# EAGLE board roverPCB (EAGLE 9.2.2)
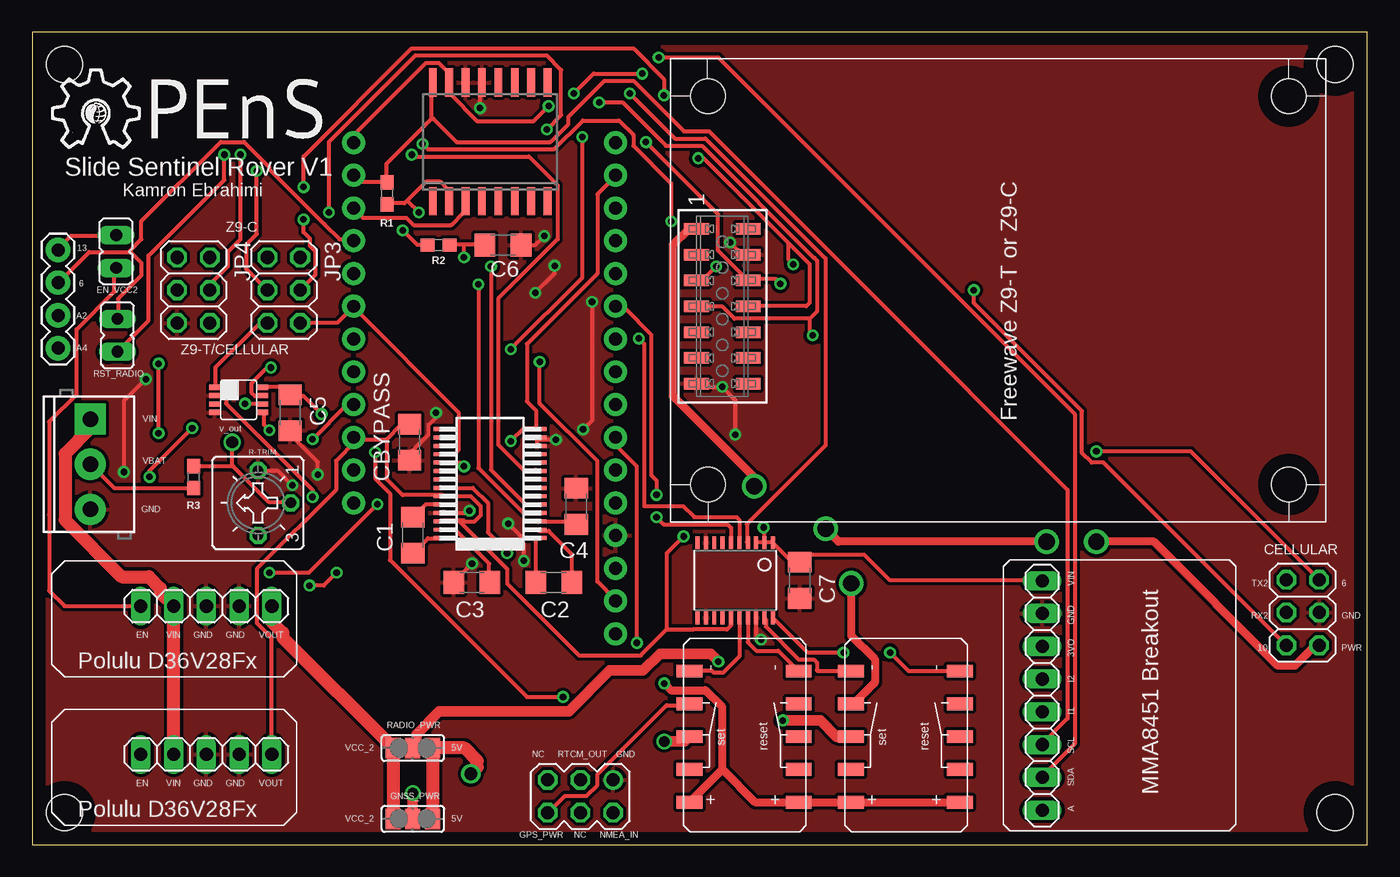
[diagram p0: board, top side]
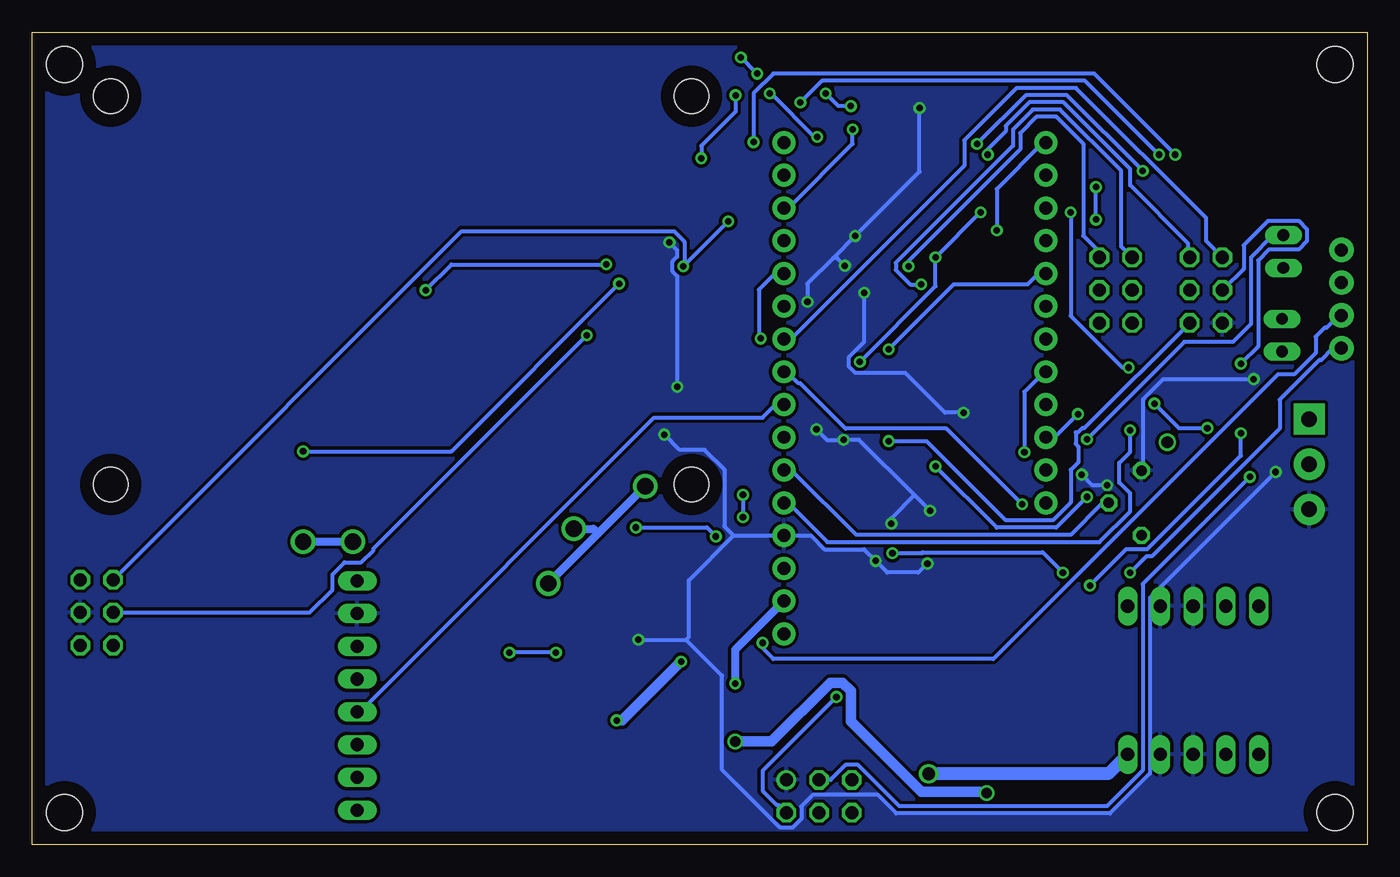
[diagram p1: board, bottom side, seen from below]

Size 103.5 x 63 mm. Coordinates in mm from the lower left corner, seen from the top.
Outline: 0,0 103.5,0 103.5,63 0,63 0,0
Copper layers (1*16): Top 0.035mm / dielectric 1.5mm / Bottom 0.035mm
Design rules "default *": minimum track width 3mil, minimum drill 0.35mm, track to track 6mil, track to pad 6mil, pad to pad 6mil, via to via 6mil, smd to smd 6mil, copper to edge 40mil, drill to drill 6mil, minimum pad ring 10mil, minimum via ring 8mil, stop-mask expansion 4mil, vias tented up to drill 0mil, thermal gap 10mil
Net classes: 0 default: width 0.305 mm, drill 0.508 mm, clearance 0.254 mm; 1 Power: width 0.635 mm, drill 1.27 mm, clearance 0.508 mm
Holes 2.8 mm at 2.5,60.5 101,60.5 2.5,2.5 101,2.5

## Footprints (pad centres in the part's own frame; a part is rotated, then mirrored left to right if it is on the bottom)
C1206 = smd 1.6 x 1.8: 1 -1.4,0; 2 1.4,0
SO16W = smd 0.6 x 2.2: 1 -4.445,-4.6; 2 -3.175,-4.6; 3 -1.905,-4.6; 4 -0.635,-4.6; 5 0.635,-4.6; 6 1.905,-4.6; 7 3.175,-4.6; 8 4.445,-4.6; 9 4.445,4.6; 10 3.175,4.6; 11 1.905,4.6; 12 0.635,4.6; 13 -0.635,4.6; 14 -1.905,4.6; 15 -3.175,4.6; 16 -4.445,4.6
DCT_R-PDSO-G8 = smd 0.4 x 0.8: 1 -0.975,-1.875; 2 -0.325,-1.875; 3 0.325,-1.875; 4 0.975,-1.875; 5 0.975,1.875; 6 0.325,1.875; 7 -0.325,1.875; 8 -0.975,1.875
1X04 = drill 1.016 pad 1.88: 1 0,0; 2 2.54,0; 3 5.08,0; 4 7.62,0
SCREWTERMINAL-3.5MM-3 = drill 1.2 pad 2.413 square: 1 0,0 | drill 1.2 pad 2.413: 2 3.5,0; 3 7,0
JP1 = drill 0.914 long: 1 0,-1.27; 2 0,1.27
2X03 = drill 1.016 octagon: 1 -2.54,-1.27; 2 -2.54,1.27; 3 0,-1.27; 4 0,1.27; 5 2.54,-1.27; 6 2.54,1.27
FEATHERWING = drill 1 pad 1.778: 1 6.35,1.27; 2 8.89,1.27; 3 11.43,1.27; 4 13.97,1.27; 5 16.51,1.27; 6 19.05,1.27; 7 21.59,1.27; 8 24.13,1.27; 9 26.67,1.27; 10 29.21,1.27; 11 31.75,1.27; 12 34.29,1.27; 13 36.83,1.27; 14 39.37,1.27; 15 41.91,1.27; 16 44.45,1.27; 17 44.45,21.59; 18 41.91,21.59; 19 39.37,21.59; 20 36.83,21.59; 21 34.29,21.59; 22 31.75,21.59; 23 29.21,21.59; 24 26.67,21.59; 25 24.13,21.59; 26 21.59,21.59; 27 19.05,21.59; 28 16.51,21.59
0603 = smd 1.1 x 1: 1 -0.85,0; 2 0.85,0
SJ_2 = smd 1.168 x 1.6: 1 -1.524,0; 2 0,0; 3 1.524,0
SSOP-28 = smd 0.3 x 1.5: 1 -4.225,-3.625; 2 -3.575,-3.625; 3 -2.925,-3.625; 4 -2.275,-3.625; 5 -1.625,-3.625; 6 -0.975,-3.625; 7 -0.325,-3.625; 8 0.325,-3.625; 9 0.975,-3.625; 10 1.625,-3.625; 11 2.275,-3.625; 12 2.925,-3.625; 13 3.575,-3.625; 14 4.225,-3.625; 15 4.225,3.625; 16 3.575,3.625; 17 2.925,3.625; 18 2.275,3.625; 19 1.625,3.625; 20 0.975,3.625; 21 0.325,3.625; 22 -0.325,3.625; 23 -0.975,3.625; 24 -1.625,3.625; 25 -2.275,3.625; 26 -2.925,3.625; 27 -3.575,3.625; 28 -4.225,3.625
POLULU_D36V28FX = drill 1.016 long: EN 0.08,-3.5; GND -7.54,-3.5; GND2 -5,-3.5; VIN -2.46,-3.5; VOUT -10.08,-3.5
CT6 = drill 0.813 octagon: A 2.515,0; E -2.515,0; S 0,-2.54
MA03-2 = drill 1.016: 1 -2.54,-1.27 | drill 1.016 octagon: 2 -2.54,1.27; 3 0,-1.27; 4 0,1.27; 5 2.54,-1.27; 6 2.54,1.27
TSSOP20 = smd 0.305 x 0.991: 1 -2.925,-2.918; 2 -2.275,-2.918; 3 -1.625,-2.918; 4 -0.975,-2.918; 5 -0.325,-2.918; 6 0.325,-2.918; 7 0.975,-2.918; 8 1.625,-2.918; 9 2.275,-2.918; 10 2.925,-2.918; 11 2.925,2.918; 12 2.275,2.918; 13 1.625,2.918; 14 0.975,2.918; 15 0.325,2.918; 16 -0.325,2.918; 17 -0.975,2.918; 18 -1.625,2.918; 19 -2.275,2.918; 20 -2.925,2.918
TQ2SS = smd 1 x 2: 2 -2.16,-4.418; 3 0.38,-4.418; 4 2.92,-4.418; 7 2.92,4.04; 8 0.38,4.04; 9 -2.16,4.04; +RST -4.7,-4.418; +SET -4.7,4.04; -RST 5.46,-4.418; -SET 5.46,4.04
Z9-T/Z9-C = smd 0.89 x 1.91: 1 6,2; 2 6,-2; 3 4,2; 4 4,-2; 5 2,2; 6 2,-2; 7 0,2; 8 0,-2; 9 -2,2; 10 -2,-2; 11 -4,2; 12 -4,-2; 13 -6,2; 14 -6,-2 | hole 2.7: -13.832,1.122; -13.832,-43.922; 16.302,-43.912; 16.302,1.122
MMA8451 = drill 1.016 long: 3VO 3.81,0; A -8.89,0; GND 6.35,0; I1 -1.27,0; I2 1.27,0; SCL -3.81,0; SDA -6.35,0; VIN 8.89,0

## Placement (x,y rotation side)
C1  .1uF  [C1206]  29.5,24 90 top
C2  .1uF  [C1206]  40.43,20.33 0 top
C3  .1uF  [C1206]  34.08,20.33 0 top
C4  .1uF  [C1206]  42.17,26.23 90 top
C5  .1uF  [C1206]  20,33.5 270 top
C6  .1uF  [C1206]  36.5,46.5 0 top
C7  .1uF  [C1206]  59.5,20.5 270 top
CBYPASS  .1uF  [C1206]  29.25,31.21 90 top
IC2  DS3231/SO  [SO16W]  35.5,54.5 0 top
IC3  741G53DCT  [DCT_R-PDSO-G8]  16,34.5 270 top
J1  [1X04]  2,38.5 90 top
J4  [SCREWTERMINAL-3.5MM-3]  4.5,33 270 top
JP1  [JP1]  6.6,39.5 180 top
JP2  [JP1]  6.5,46 180 top
JP3  [2X03]  19.5,43 270 top
JP4  [2X03]  12.5,43 270 top
JP5  [2X03]  98.5,18 90 top
MS1  FEATHERWING  [FEATHERWING]  46.5,10 90 top
R1  10k  [0603]  27.5,50.5 270 top
R2  10k  [0603]  31.5,46.5 0 top
R3  [0603]  12.5,28.5 270 top
SJ1  [SJ_2]  29.5,7.5 0 top
SJ2  [SJ_2]  29.5,2 0 top
U$1  MAX3243  [SSOP-28]  35.5,28 90 top
U$2  OPENS-LOGO  [OPENS-LOGO]  1.25,50.25 0 top
U$3  POLULU_D36V28FX  [POLULU_D36V28FX]  8.5,3.5 180 top
U$4  CT6EP205  [CT6]  17.5,26.5 90 top
U$5  GNSS_RECEIVER  [MA03-2]  42.5,3.75 180 top
U$7  MAX4820  [TSSOP20]  54.5,20.5 180 top
U$8  TQ2SS  [TQ2SS]  67.5,8 90 top
U$9  TQ2SS  [TQ2SS]  55,8 90 top
U$11  Z9-T/Z9-C  [Z9-T/Z9-C]  53.5,41.75 90 top
U$12  POLULU_D36V28FX  [POLULU_D36V28FX]  8.5,15 180 top
U$13  MMA8451  [MMA8451]  78.3,11.57 90 top

## Library data of the parts
C1-C7 CBYPASS = eagle-ltspice; SPICEMODEL: NONE; SPICEPREFIX: C
IC2 MS1 = adafruit
IC3 = 74xx-little-de
J1 = SparkFun-Connectors; PROD_ID: CONN-09696
J4 = SparkFun-Connectors; PROD_ID: CONN-08288; SF_ID: PRT-08235
JP1 JP2 = jumper
JP3-JP5 = pinhead
R1 R2 = SparkFun-Resistors; PROD_ID: RES-08787
R3 = SparkFun-Resistors; PROD_ID: RES-08361
SJ1 SJ2 = SparkFun-Retired
U$1 = ftdi4
U$2 = opens-logo
U$3 U$5 U$8 U$9 U$11-U$13 = SlideSentinel
U$4 = tango
U$7 = MAX4820

## Nets
3.3V_M0: C6.1 IC2.2 MS1.2 R1.2 R2.2 U$8.+RST U$8.+SET U$9.+RST U$9.+SET
5: IC2.3 MS1.19
6: J1.3 JP1.1 MS1.20
9: MS1.21 U$7.4
10: JP3.6 MS1.22 U$1.18
12: MS1.24 U$5.2
13: J1.4 JP2.1 MS1.25
A0: IC3.5 MS1.5
A1: MS1.6 R3.1 U$4.S
A2: J1.2 MS1.7
A3: MS1.8 U$13.I1
A4: J1.1 MS1.9
A5: JP4.1 MS1.10
C1+: C1.1 U$1.28
CD_RADIO: JP3.4 JP5.2 U$11.8
FORCEOFF_MAX: JP4.3 U$1.22
GND: C3.1 C4.2 C5.2 C6.2 C7.2 CBYPASS.1 IC2.13 IC2.14 IC3.2 IC3.4 J4.3 JP4.5 JP5.3 MS1.4 U$1.12 U$1.13 U$1.25 U$3.GND U$3.GND2 U$4.A U$5.1 U$7.9 U$7.12 U$7.18 U$11.4 U$11.13 U$12.GND U$12.GND2 U$13.GND
GPS_PWR: U$5.6 U$9.7
MISO: MS1.13
MOSI: MS1.12 U$7.5
N$1: SJ2.2 U$9.8
N$2: SJ1.2 U$8.8
N$4: C2.1 U$1.1
N$5: C2.2 U$1.2
N$10: C4.1 U$1.3
N$11: C1.2 U$1.24
N$13: C3.2 U$1.27
OUT1: U$7.20 U$8.-RST
OUT2: U$7.19 U$8.-SET
OUT3: U$7.17 U$9.-RST
OUT4: U$7.16 U$9.-SET
RADIO_PWR [Power]: JP5.1 U$8.7 U$11.1
RS232_CD_FROM_RADIO: JP3.2 U$1.5
RS232_TX_FROM_M0: JP4.2 U$1.9
RS232_TX_FROM_RADIO: JP3.1 U$1.4
RTCM_IN: IC3.6 U$5.3
RX: IC3.7 MS1.14
RX_RADIO: JP4.4 JP5.4 U$11.7
SCK: MS1.11 U$7.6
SCL: IC2.16 MS1.18 R1.1 U$13.SCL
SDA: IC2.15 MS1.17 R2.1 U$13.SDA
TX: JP4.6 MS1.15 U$1.14
TX_FROM_RADIO: IC3.1 JP3.5 U$1.19
TX_RADIO: JP3.3 JP5.6 U$11.5
VBAT: J4.2 R3.2
VCC: C5.1 C7.1 CBYPASS.2 IC3.8 MS1.26 SJ1.3 SJ2.3 U$1.23 U$1.26 U$3.VOUT U$7.1 U$7.2 U$7.3 U$7.15 U$13.VIN
VCC_2: SJ1.1 SJ2.1 U$12.VOUT
VIN: J4.1 U$3.VIN U$12.VIN
X1: JP1.2 JP5.5 U$11.6
X2: JP2.2 U$12.EN

## Tracks (layer width: path | path; a pad name or v marks a point on that pad's centre or on a via)
3.3V_M0  (via drill 0.51)
  Top 0.305: 33.47,46.52 35.01,46.52 C6.1 | 33.47,46.52 32.35,46.52 R2.2 | 29.07,49.94 30.54,51.41 31.65,51.41 32.21,50.85 32.21,50.01 IC2.2 | 29.07,49.94 28.86,49.73 27.6,49.73 R1.2 | v33.47,45.54 33.47,46.52 | 29.07,49.94 v29.98,49.03 | v39.34,37.44 39.34,34.23 43.81,29.76 43.81,20.4 45.2,19 MS1.2
  Top 0.61: v49,12.5 49.52,11.98 52.19,11.98 53.5,10.67 53.5,5.84 | 53.5,5.84 56.04,3.3 U$9.+RST U$8.+SET U$8.+RST | 53.5,5.84 U$9.+SET
  Bottom 0.305: v29.98,49.03 v33.47,45.54 33.47,43.31 v39.34,37.44
  Bottom 0.61: MS1.2 49,15.12 v49,12.5
5
  Top 0.305: IC2.3 33.47,49.87 33.47,49.03 32.49,48.06 29.56,48.06 29,48.62 25.65,48.62 24.95,49.31 MS1.19
6
  Top 0.305: 7.62,45.96 8.46,45.12 8.46,44.15 6.65,42.33 6.65,40.79 JP1.1 | 7.62,45.96 4.41,45.96 2.04,43.59 J1.3 | MS1.20 24.81,46.94 23.83,46.94 22.64,48.13 18.38,52.39 18.38,52.53 16.43,54.48 14.61,54.48 8.46,48.34 8.46,46.94 7.62,46.1 7.62,45.96
9  (via drill 0.51)
  Top 0.305: v46.32,58.26 49.81,54.76 52.19,54.76 61.5,45.45 61.5,30.96 58.06,27.52 57.77,27.23 55.4,24.87 55.4,23.47 U$7.4 | v42.65,54.88 42.65,43.96 v37.1,38.42
  Bottom 0.305: v46.32,58.26 46.22,58.26 42.85,54.88 v42.65,54.88 | v37.1,38.42 32.07,43.45 26.34,43.45 25.51,44.28 24.95,44.28 MS1.21
10
  Top 0.305: U$1.18 31.93,30.32 32.77,30.32 33.05,30.59 33.05,33.53 24.95,41.63 MS1.22 23.62,40.46 JP3.6
12  (via drill 0.51)
  Top 0.305: v41.15,11.46 38.36,11.46 27.74,22.07 27.74,27.24 26.58,28.4 v26.58,30.43
  Bottom 0.305: v41.15,11.46 46.88,5.73 46.88,4.19 45.76,3.07 45.62,3.07 45.06,2.52 U$5.2 | v26.58,30.43 26.58,35.11 24.95,36.74 MS1.24
13  (via drill 0.51)
  Top 0.305: JP2.1 6.37,47.22 3.02,47.22 2.04,46.24 J1.4 | v21.73,31.43 24.39,34.09 24.81,34.09 MS1.25
  Bottom 0.305: v21.73,31.43 14.19,38.98 10.42,38.98 9.02,40.37 9.02,45.54 7.34,47.22 6.51,47.22 JP2.1
A0  (via drill 0.51)
  Top 0.305: v18.38,32.13 17.96,32.55 17.96,33.39 IC3.5
  Bottom 0.305: v18.38,32.13 18.38,30.45 19.22,29.62 19.22,28.08 18.38,27.24 18.38,25.84 20.76,23.47 41.85,23.47 44.78,26.4 45.2,26.4 MS1.5
A1  (via drill 0.9)
  Top 0.305: 15.5,29.34 15.59,29.34 18.38,26.54 19.92,26.54 U$4.S | 15.5,29.34 12.51,29.34 R3.1 | 15.5,29.34 v15.5,31.2
  Bottom 0.305: MS1.6 45.2,28.92 44.51,28.92 39.62,24.03 22.99,24.03 20.62,26.4 20.06,26.4 U$4.S
A2  (via drill 0.51)
  Top 0.305: v46.88,15.65 46.88,29.34 45.34,30.87 45.34,31.57 MS1.7
  Bottom 0.305: v46.88,15.65 47.02,15.51 47.02,15.37 46.04,14.39 29,14.39 6.93,36.46 5.67,36.46 3.99,38.14 3.99,39.4 3.29,40.09 3.15,40.09 2.32,40.93 2.04,40.93 J1.2
A3
  Bottom 0.305: U$13.I1 78.17,10.34 78.06,10.34 55.28,33.11 46.88,33.11 45.9,34.09 45.34,34.09 MS1.8
A4  (via drill 0.51)
  Top 0.305: v26.76,26.4 21.45,21.09 v18.38,21.09
  Bottom 0.305: v26.76,26.4 32.63,32.27 40.45,32.27 43.95,35.76 44.09,35.76 44.92,36.6 45.2,36.6 MS1.9 | v18.38,21.09 17.12,22.35 16.7,22.35 6.79,32.27 6.79,34.51 3.71,37.58 3.57,37.58 2.73,38.42 2.04,38.42 J1.1
A5
  Bottom 0.305: MS1.10 45.2,39.26 44.65,39.26 31.23,52.67 31.23,54.62 27.18,58.67 22.57,58.67 12.51,48.62 12.51,46.82 JP4.1
C1+
  Top 0.305: U$1.28 31.79,23.75 30.68,23.75 29.56,22.63 C1.1
CD_RADIO  (via drill 0.51)
  Top 0.305: 58.64,46.64 52.05,53.23 v51.63,53.23 | v48.98,58.12 48.98,59.37 46.6,61.75 29.42,61.75 21.04,53.37 v21.04,50.99 | v21.04,48.48 21.04,47.5 21.52,47.02 21.52,46.45 21.94,46.02 21.94,44.17 JP3.4 | 58.64,46.64 60.27,45 60.27,42 60.02,41.75 U$11.8 | v73,43 73,42.01 81.39,33.62 81.39,30.39 82.14,29.64 83.05,29.64 JP5.2 | v59,45 58.64,45.36 58.64,46.64
  Bottom 0.305: v51.63,53.23 51.63,54.2 48.98,56.86 v48.98,58.12 | v21.04,48.48 v21.04,50.99 | v73,43 71,45 v59,45
FORCEOFF_MAX  (via drill 0.51)
  Top 0.305: v36.81,22.61 36.81,22.74 35.32,24.23 35.32,26.49 34.14,27.67 31.88,27.67 U$1.22 | v23.6,21.1 22.6,20.1 v21.5,20.1 | v9.8,31.9 v9.8,37.3
  Bottom 0.305: v36.81,22.61 34.52,22.61 34.46,22.66 25.16,22.66 v23.6,21.1 | v21.5,20.1 18.68,22.92 17.06,22.92 9.8,30.18 v9.8,31.9 | v9.8,37.3 8.46,38.64 8.46,45.31 7.62,46.15 5.33,46.15 4.67,46.81 4.67,47.73 5.33,48.39 7.67,48.39 9.58,46.48 9.58,44.65 JP4.3
GND  (via drill 0.51)
  Top 0.305: C6.2 39,46.5 v39.7,47.2 | v43.4,42.1 43.4,32.9 v42.7,32.2 | v40.6,31.4 39.3,31.4 U$1.13 U$1.12 | v34.71,57.11 34.71,58.95 IC2.13 | v33.9,25.9 33.73,25.73 32.11,25.73 32.1,25.73 32.09,25.73 U$1.25 | v34.1,21.8 32.68,20.38 C3.1 | U$4.A 19.02,29.02 v20.16,27.87 | v22.13,28.7 22.13,29.67 20,31.8 C5.2 | v39,42.8 40.5,44.3 v40.5,44.9 | v36.9,24.9 37.97,23.83 37.97,23.46 38.11,23.32 v38.11,22.01 | v8.8,36.1 7.1,34.4 v7.1,28.9 | CBYPASS.1 29.25,30.34 30.72,31.8 30.72,32.54 31.3,33.12 v31.3,33.5 | v54.1,46.7 55.05,45.75 U$11.4 | U$11.13 51.75,35.5 v53.5,35.5 54.5,34.5 v54.5,31.8 | U$7.18 56.12,16.27 v56.5,15.9
  Bottom 0.305: v56.5,15.9 52.8,15.9 | 52.8,15.9 52.6,16.1 52.6,20.5 49.13,23.97 | 49.13,23.97 MS1.4 43.14,23.97 42.08,22.91 39.01,22.91 v38.11,22.01 37.2,21.1 34.8,21.1 v34.1,21.8 | v54.5,31.8 53.32,30.62 51.38,30.62 49.84,29.09 49.84,24.68 49.13,23.97 | v54.1,46.7 53.5,46.1 53.5,45.59 53.89,45.2 53.89,44.49 53.5,44.09 v53.5,35.5 | 41.4,45.5 v39.7,47.2 34.71,52.19 v34.71,57.11 | 41.4,45.5 43.4,43.5 v43.4,42.1 | v42.7,32.2 41.9,31.4 v40.6,31.4 39.4,31.4 35.1,27.1 | v33.9,25.9 35.1,27.1 | 35.1,27.1 36.9,25.3 v36.9,24.9 | v20.16,27.87 21.3,27.87 v22.13,28.7 | v39,42.8 39,39 40.2,37.8 40.2,37.08 39.69,36.58 35.81,36.58 32.73,33.5 v31.3,33.5 | v40.5,44.9 41.1,45.5 41.4,45.5 | U$4.A 17.36,29.15 17.36,34.56 15.82,36.1 v8.8,36.1 | v7.1,28.9 16.85,19.15 16.85,5.52 19.94,2.43 36.51,2.43 37.93,3.85 42.98,3.85 43.87,2.96 43.87,2 44.56,1.31 45.52,1.31 50.01,5.8 50.01,13.11 52.8,15.9
  pour Top: 0,63 103.5,63 103.5,0 0,0
  pour Bottom: 0,63 103.5,63 103.5,0 0,0
  pour Top: 52.4,22 56.5,22 56.5,19 52.3,19 52.3,22
GPS_PWR
  Top 0.305: U$5.6 40.03,2.52 41.29,3.77 42.97,3.77 43.81,4.61 43.81,5.45 49.18,10.82 50.86,10.82 U$9.7
MOSI  (via drill 0.51)
  Top 0.305: v47.02,39.26 47.44,38.84 47.44,26.26 50.47,26.26 51.34,25.4 54.6,25.4 54.83,25.18 U$7.5
  Bottom 0.305: v47.02,39.26 47.16,39.4 47.16,43.03 45.9,44.28 45.34,44.28 MS1.12
N$1  (via drill 0.8)
  Top 0.8: SJ2.2 v29.5,4 | v49,8 50.58,8 U$9.8
  Bottom 0.8: v29.5,4 29.6,4.1 34.58,4.1 40.04,9.56 40.04,11.92 40.69,12.57 41.61,12.57 46.18,8 v49,8
N$2  (via drill 0.51)
  Top 0.8: SJ1.2 29.79,7.79 29.79,8.57 31.56,10.34 41.61,10.34 44.77,13.5 47.35,13.5 48.66,14.8 52.61,14.8 53.2,14.22 v53.2,14.2 | v58.2,9.64 61.11,9.64 62.37,8.38 U$8.8
  Bottom 0.8: v53.2,14.2 57.76,9.64 v58.2,9.64
N$4
  Top 0.305: U$1.1 39.06,23.75 39.06,20.4 C2.1
N$5
  Top 0.305: U$1.2 39.34,24.33 40.04,24.33 41.83,22.55 C2.2
N$10
  Top 0.305: U$1.3 39.2,25.01 41.99,25.01 42.13,24.87 C4.1
N$11
  Top 0.305: U$1.24 31.79,26.4 30.54,26.4 29.56,25.43 C1.2
N$13
  Top 0.305: U$1.27 31.93,24.45 32.77,24.45 35.42,21.79 35.42,20.4 C3.2
OUT1  (via drill 0.51)
  Top 0.305: U$7.20 60.08,14.93 62.88,14.93 v62.9,14.9 | v66.5,14.9 67.94,13.46 U$8.-RST
  Bottom 0.305: v62.9,14.9 v66.5,14.9
OUT2
  Top 0.305: U$8.-SET 60.9,13.46 60.83,13.53 60.83,14.13 60.59,14.37 59.42,14.37 56.87,16.92 56.87,17.49 U$7.19
OUT3
  Top 0.305: U$9.-RST 57.84,15.04 56.14,15.04 55.48,15.7 U$7.17
OUT4
  Top 0.305: U$9.-SET 52.72,13.46 52.84,13.34 53.56,13.34 54.83,14.6 U$7.16
RADIO_PWR  (via drill 1.27)
  Top 0.635: v55.96,27.8 55.96,28.5 49.67,34.78 49.67,46.52 50.9,47.75 U$11.1 | v63.51,20.26 63.51,16.2 65.32,14.39 65.32,12.57 63.67,10.92 U$8.7 | JP5.1 99.47,15.46 97.89,13.87 96.57,13.87 86.94,23.5 v82.5,23.5 | v78.66,23.5 62.5,23.5 v61.5,24.5
  Bottom 0.635: v63.51,20.26 59.63,24.13 | 59.63,24.13 v55.96,27.8 | v82.5,23.5 v78.66,23.5 | v61.5,24.5 60,24.5 59.63,24.13
RS232_CD_FROM_RADIO  (via drill 0.51)
  Top 0.305: v35.56,44.84 35.56,29.06 38.22,26.4 39.06,26.4 U$1.5
  Bottom 0.305: v35.56,44.84 35.56,45.26 26.9,53.92 26.9,55.18 25.65,56.44 24.11,56.44 22.01,54.34 22.01,47.22 20.77,45.98 JP3.2
RS232_TX_FROM_M0  (via drill 0.51)
  Top 0.305: v29.42,53.51 29.56,53.37 38.5,53.37 40.73,51.13 40.73,46.94 36.12,42.33 36.12,31.01 38.08,29.06 39.06,29.06 U$1.9
  Bottom 0.305: v29.42,53.51 29.42,53.92 28.02,55.32 28.02,55.74 26.2,57.56 23.55,57.56 18.38,52.39 18.38,51.13 13.91,46.66 13.91,45.68 JP4.2
RS232_TX_FROM_RADIO  (via drill 0.51)
  Top 0.305: v34.59,43.45 34.59,29.2 38.08,25.7 39.06,25.7 U$1.4
  Bottom 0.305: v34.59,43.45 35.42,43.45 36.54,44.56 36.54,45.12 27.46,54.2 27.46,55.46 25.93,57 23.83,57 19.08,52.25 19.08,46.39 JP3.1
RTCM_IN  (via drill 0.51)
  Top 0.305: IC3.6 16.52,34.17 v16.5,34.2 | v12.4,32.3 9.1,29 v9.1,28.52
  Bottom 0.305: v16.5,34.2 14.6,32.3 v12.4,32.3 | v9.1,28.52 17.41,20.21 17.41,5.75 20.18,2.99 36.28,2.99 39.48,6.19 40.44,6.19 41.61,5.02 U$5.3
RX  (via drill 0.51)
  Top 0.305: v22.99,49.03 22.99,54.48 29.7,61.19 39.9,61.19 41.01,60.07 41.01,56.58 v39.9,55.46 | IC3.7 17.82,34.78 17.26,34.78 16.98,35.06 16.98,35.76 18.22,37 v18.5,37
  Bottom 0.305: v22.99,49.03 22.99,41 18.99,37 v18.5,37 | v39.9,55.46 39.9,54.34 44.78,49.45 45.2,49.45 MS1.14
RX_RADIO  (via drill 0.51)
  Top 0.305: v43.95,57.56 45.76,57.56 49.12,54.2 51.91,54.2 60.61,45.5 60.66,45.5 60.83,45.33 60.83,41.33 60.29,40.79 | v16.15,53.51 16.15,46.94 15.17,45.96 15.17,44.84 13.77,43.45 JP4.4 | U$11.7 53.47,41.75 54.42,40.79 60.29,40.79 | v60.5,39.5 60.29,39.71 60.29,40.79
  Bottom 0.305: v43.95,57.56 42.27,59.23 21.87,59.23 v16.15,53.51 | JP5.4 82,18 80.23,19.77 80.23,20.94 79.29,21.89 77.99,21.89 77.04,22.83 77.04,22.96 v60.5,39.5
SCK  (via drill 0.51)
  Top 0.305: MS1.11 45.34,41.63 45.9,41.63 48,39.53 48,28.64 48.4,28.24 v48.4,27.13 | v48.4,25.4 48.96,24.84 53.9,24.84 54.17,24.57 U$7.6
  Bottom 0.305: v48.4,27.13 v48.4,25.4
SCL
  Top 0.305: MS1.18 24.95,51.83 25.37,51.41 27.46,51.41 R1.1 27.46,51.55 27.46,52.81 30.95,56.3 | 30.95,56.3 30.95,59.09 IC2.16 | 65.05,42.74 52.47,55.32 50.51,55.32 46.6,59.23 44.37,59.23 41.57,56.44 41.57,55.88 40.17,54.48 32.91,54.48 31.09,56.3 30.95,56.3 | 65.05,42.74 80.27,27.52 80.27,9.78 78.31,7.82 U$13.SCL | 65.05,42.74
SDA  (via drill 0.51)
  Top 0.305: v28.72,47.64 29.84,46.52 30.54,46.52 R2.1 | MS1.17 24.95,54.48 24.95,55.04 30.54,60.63 31.51,60.63 32.21,59.93 32.21,59.23 IC2.15 32.35,58.95 32.35,58.26 34.53,56.08 38.84,56.08 v40.03,57.28 | v48.56,61.05 53.17,61.05 80.83,33.39 80.83,7.82 78.31,5.31 U$13.SDA | v47.3,59.79 43.53,59.79 v41.99,58.26
  Bottom 0.305: v28.72,47.64 28.72,50.85 25.23,54.34 24.95,54.34 MS1.17 | v47.3,59.79 v48.56,61.05 | v41.99,58.26 41.01,57.28 v40.03,57.28
TX  (via drill 0.51)
  Top 0.305: MS1.15 45.2,51.83 43.81,50.43 43.81,44.28 38.36,38.84 38.36,34.37 39.06,33.67 39.06,32.27 U$1.14 38.92,32.27 38.08,32.27 v37.1,31.29
  Bottom 0.305: v37.1,31.29 34.17,31.29 28.02,25.15 24.39,25.15 22.99,26.54 22.99,29.06 22.4,29.65 22.4,30.88 22.6,31.07 22.6,31.97 22.42,31.97 22.09,32.3 21.93,32.3 JP4.6
TX_FROM_RADIO  (via drill 0.51)
  Top 0.305: v33.47,29.34 33.19,29.62 31.93,29.62 U$1.19 | v21.73,26.96 21.73,27.52 15.03,34.23 15.03,35.2 14.75,35.48 14.33,35.48 IC3.1 14.19,35.48 14.19,37 17.65,40.46 JP3.5
  Bottom 0.305: v33.47,29.34 28.72,24.59 24.11,24.59 v21.73,26.96
TX_RADIO  (via drill 0.51)
  Top 0.305: v49.53,48.34 49.53,51.27 46.6,54.2 46.6,55.04 45.48,56.16 42.69,56.16 40.45,53.92 30.68,53.92 v30.26,54.34 | v17.4,52.25 17.4,47.36 16.57,46.52 16.57,44.66 JP3.3 | U$11.5 51.93,43.75 v53.03,44.84
  Bottom 0.305: v30.26,54.34 26.48,58.12 23.27,58.12 v17.4,52.25 | v49.53,48.34 52.94,44.94 | 52.94,44.94 v53.03,44.84 | 52.94,44.94 52.94,46.76 53.74,47.56 70.21,47.56 JP5.6
VBAT
  Top 0.305: R3.2 12.37,27.66 6.37,27.66 4.55,29.48 J4.2
VCC  (via drill 0.51, 1)
  Top 0.305: U$7.2 56.66,23.47 56.24,23.47 U$7.3 | U$7.2 56.8,23.47 57.36,23.47 U$7.1 57.5,23.33 58.9,21.93 59.45,21.93 C7.1 59.59,21.93 60.15,22.49 64.48,22.49 66.44,20.54 78.17,20.54 U$13.VIN | IC3.8 17.96,35.48 19.36,35.48 19.92,34.92 C5.1 20.06,34.78 21.04,34.78 v22.43,33.39 | 33.05,25.15 31.93,25.15 U$1.26 | 27.47,31.43 27.47,28.35 28.72,27.1 31.8,27.1 U$1.23 34,27.02 34.76,26.26 34.76,25.54 34.26,25.04 33.54,25.04 33.43,25.15 33.05,25.15 | U$3.VOUT 18.52,7.12 18.52,16.07 17.4,17.18 17.4,21.37 23.55,27.52 23.55,29.76 25.09,31.29 MS1.26 24.95,31.57 25.09,31.43 27.47,31.43 | 33.05,25.15 36.82,21.37 36.82,20.26 42.41,14.67 47.16,14.67 49.19,16.7 | 27.47,31.43 28.65,32.61 CBYPASS.2 | 49.19,16.7 51.23,16.7 51.25,16.68 53.85,16.68 54.17,17.01 U$7.15 | U$7.2 56.77,24.52 v56.7,24.6 | v50.5,23.9 49.19,22.59 49.19,16.7
  Top 1: v34,5.5 34.5,6 34.5,6.5 33.5,7.5 SJ1.3 SJ2.3
  Bottom 0.305: v22.43,33.39 24.11,31.71 24.81,31.71 MS1.26 | v56.7,24.6 51.2,24.6 v50.5,23.9
  Bottom 1: U$3.VOUT 20.08,5.5 v34,5.5
VCC_2
  Top 1: U$12.VOUT 18.58,17.29 19.43,16.44 19.43,16.05 SJ1.1 SJ2.1
VIN
  Top 1: J4.1 4.5,32.27 2.54,30.31 2.54,25.19 6.95,20.78 9.05,20.78 9.94,19.89 9.94,19.52 U$12.VIN U$3.VIN
X1  (via drill 0.51)
  Top 0.305: v47.58,54.48 53.17,48.9 53.17,46.08 55.38,43.88 | v14.89,53.51 14.89,51.55 9.02,45.68 9.02,40.65 6.65,38.28 JP1.2 | U$11.6 55.38,43.88 | JP5.5 89.81,30.5 v82.5,30.5 | v58,43.5 57.62,43.88 55.38,43.88
  Bottom 0.305: v47.58,54.48 47.58,58.26 46.04,59.79 21.18,59.79 v14.89,53.51 | v82.5,30.5 71,30.5 v58,43.5
X2
  Top 0.305: JP2.2 6.37,44.7 6.37,42.89 3.43,39.95 3.43,34.92 1.32,32.81 1.32,25.59 1.32,19.68 2.5,18.5 U$12.EN

## Text on the board
tNames: Slide Sentinel Rover V1 | Kamron Ebrahimi | Z9-C | 13 | 6 | EN_VCC2 | A2 | A4 | Z9-T/CELLULAR | RST_RADIO | VIN | v_out | VBAT | R-TRIM | GND | CELLULAR | TX2 | 6 | RX2 | GND | 10 | PWR | RADIO_PWR | VCC_2 | 5V | NC | RTCM_OUT | GND | GNSS_PWR | VCC_2 | 5V | GPS_PWR | NC | NMEA_IN